# EAGLE board forcesch (EAGLE 9.6.2)
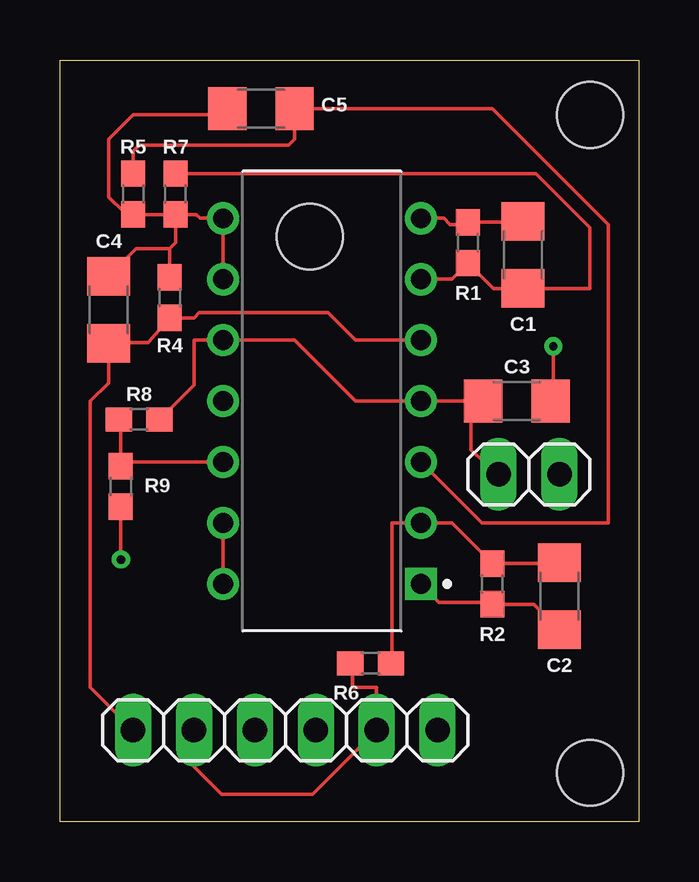
[diagram p0: board, top side]
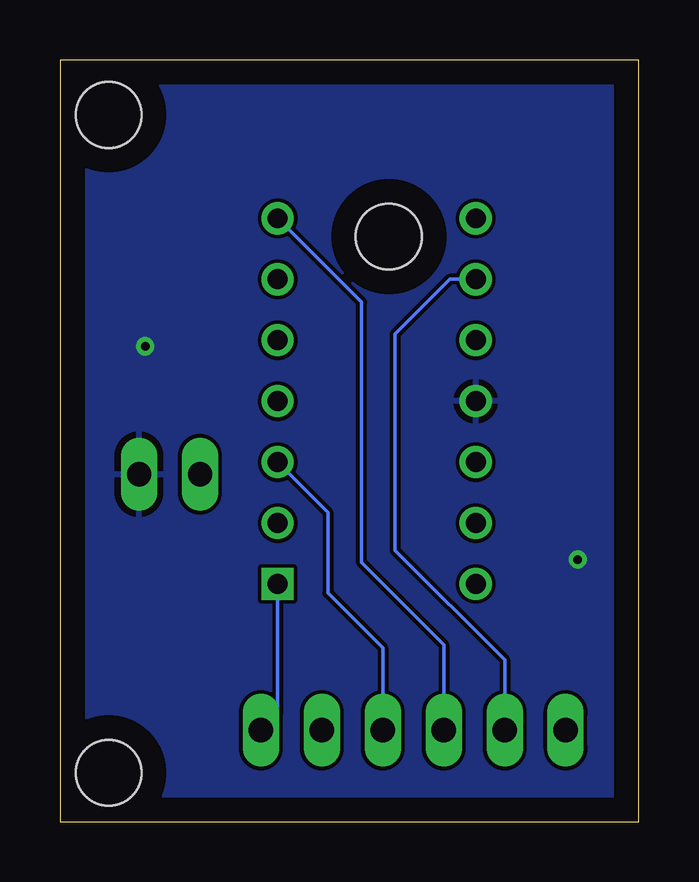
[diagram p1: board, bottom side, seen from below]

Size 24.13 x 31.75 mm. Coordinates in mm from the lower left corner, seen from the top.
Outline: 0,0 0,31.75 24.13,31.75 24.13,0 0,0
Copper layers (1*16): Top 0.035mm / dielectric 1.5mm / Bottom 0.035mm
Design rules "default": minimum track width 6mil, minimum drill 0.35mm, track to track 6mil, track to pad 6mil, pad to pad 6mil, via to via 6mil, smd to smd 6mil, copper to edge 40mil, drill to drill 6mil, minimum pad ring 10mil, minimum via ring 8mil, stop-mask expansion 4mil, vias tented up to drill 0mil, thermal gap 10mil
Holes 2.75 mm at 10.41,24.38 22.1,29.46 22.1,2.03

## Footprints (pad centres in the part's own frame; a part is rotated, then mirrored left to right if it is on the bottom)
1206 = smd 1.6 x 1.8: 1 -1.4,0; 2 1.4,0
1X02 = drill 1.016 long: 1 -1.27,0; 2 1.27,0
1X06 = drill 1.016 long: 1 -6.35,0; 2 -3.81,0; 3 -1.27,0; 4 1.27,0; 5 3.81,0; 6 6.35,0
0603 = smd 1.1 x 1: 1 -0.85,0; 2 0.85,0
DIP825W47P254L1917H533Q14 = drill 0.83 pad 1.18 square: 1 -4.128,7.62 | drill 0.83 pad 1.18: 2 -4.128,5.08; 3 -4.128,2.54; 4 -4.128,0; 5 -4.128,-2.54; 6 -4.128,-5.08; 7 -4.128,-7.62; 8 4.128,-7.62; 9 4.128,-5.08; 10 4.128,-2.54; 11 4.128,0; 12 4.128,2.54; 13 4.128,5.08; 14 4.128,7.62

## Placement (x,y rotation side)
C1  10n  [1206]  19.3,23.62 270 top
C2  10n  [1206]  20.83,9.4 270 top
C3  0u1  [1206]  19.05,17.53 0 top
C4  100n  [1206]  2.03,21.34 90 top
C5  100n  [1206]  8.38,29.72 0 top
JP1  [1X02]  19.56,14.48 0 top
JP4  [1X06]  9.4,3.81 0 top
R1  22k  [0603]  17.02,24.13 90 top
R2  22k  [0603]  18.03,9.91 90 top
R4  1Meg  [0603]  4.57,21.84 270 top
R5  1Meg  [0603]  3.05,26.16 270 top
R6  2k7  [0603]  12.95,6.6 0 top
R7  2k7  [0603]  4.83,26.16 90 top
R8  1Meg  [0603]  3.3,16.76 0 top
R9  1Meg  [0603]  2.54,13.97 90 top
U$1  LM324N/NOPB  [DIP825W47P254L1917H533Q14]  10.92,17.53 180 top

## Library data of the parts
C1-C5 = SparkFun-Capacitors
JP1 JP4 = pinhead
R1 R2 R4-R9 = SparkFun-Resistors
U$1 = LM324N_NOPB; AVAILABILITY: In Stock; DESCRIPTION: Quad, 30-V, 1.2-MHz operational amplifier; MF: Texas Instruments; MP: LM324N; PACKAGE: PDIP-14 Texas Instruments; PRICE: None; PURCHASE-URL: https://pricing.snapeda.com/search/part/LM324N/?ref=eda

## Nets
GND: C3.2 JP1.2 R9.1 U$1.11
L-: C2.1 R2.2 R6.2 U$1.2
LIN+: C5.2 JP4.4 R5.1 U$1.3
LOUT: C2.2 JP4.6 R2.1 U$1.1
N$2: U$1.13 U$1.14
N$9: R8.1 R9.2 U$1.12
R-: C1.2 R1.1 R7.2 U$1.6
RIN+: C4.1 JP4.1 R4.2 U$1.5
RLIN-: C4.2 C5.1 JP4.2 JP4.5 R4.1 R5.2 R6.1 R7.1 U$1.8 U$1.9
ROUT: C1.1 JP4.3 R1.2 U$1.7
VCC: C3.1 JP1.1 R8.2 U$1.4 U$1.10

## Tracks (layer width: path | path; a pad name or v marks a point on that pad's centre or on a via)
GND  (via drill 0.35)
  Top 0.152: v20.57,19.81 20.57,17.65 C3.2 | R9.1 v2.54,10.92
  pour Bottom: 0,31.75 24.13,31.75 24.13,0 0,0
L-
  Top 0.152: C2.1 20.79,10.76 R2.2 16.34,12.45 U$1.2 13.84,12.45 13.84,6.74 R6.2
LIN+
  Top 0.152: U$1.3 17.59,12.45 22.86,12.45 22.86,24.89 18.03,29.72 C5.2 9.78,28.45 9.53,28.19 3.3,28.19 3.05,27.94 R5.1
  Bottom 0.152: U$1.3 12.95,12.89 12.95,9.52 10.67,7.24 JP4.4
LOUT
  Top 0.152: U$1.1 15.81,9.14 18.03,9.14 R2.1 19.77,9.06 C2.2
  Bottom 0.152: JP4.6 15.05,4.51 U$1.1
N$2
  Top 0.152: U$1.14 U$1.13
N$9
  Top 0.152: R8.1 2.54,16.68 R9.2 2.71,14.99 U$1.12
R-
  Top 0.152: U$1.6 16.34,22.61 R1.1 18.08,22.22 C1.2 22.09,22.22 22.1,22.23 22.1,24.77 19.85,27.01 R7.2
RIN+
  Top 0.152: U$1.5 12.32,20.07 11.17,21.22 5.81,21.22 5.59,20.99 R4.2 3.68,19.98 2.03,19.98 C4.1 2.03,18.29 1.27,17.53 1.27,5.59 JP4.1
RLIN-
  Top 0.152: C4.2 3.17,23.88 4.57,23.88 | 4.57,23.88 R4.1 | U$1.9 U$1.8 5.84,25.15 5.68,25.31 R7.1 | 4.57,23.88 4.83,24.13 R7.1 | R7.1 R5.2 3.05,25.4 2.67,25.4 2.03,26.04 2.03,28.45 3.05,29.46 6.73,29.46 C5.1 | JP4.2 5.59,2.29 6.73,1.14 10.54,1.14 JP4.5 13.21,5.59 12.19,5.59 12.19,6.52 R6.1
  Bottom 0.152: U$1.9 7.87,22.61 10.16,20.32 10.16,11.3 5.59,6.73 JP4.2
ROUT
  Top 0.152: U$1.7 16,25.15 16.26,24.89 16.93,24.89 R1.2 19.26,24.98 C1.1
  Bottom 0.152: JP4.3 8.13,7.37 11.56,10.8 11.56,21.65 U$1.7
VCC
  Top 0.152: JP1.1 17.14,15.49 17.14,17.02 C3.1 U$1.4 12.32,17.53 9.78,20.07 U$1.10 5.59,20.07 5.59,18.2 R8.2

## Text on the board
tDocu: PWR | GND | piezoelectric voltage mode amplifier / version 1.0 / Ben Westcott, Jilun Yang (2023) | RIN+ | RIN- | ROUT | LIN+ | LIN- | LOUT